# EAGLE board Circuit 7 using 2 555 Bistable units (EAGLE 5.06)
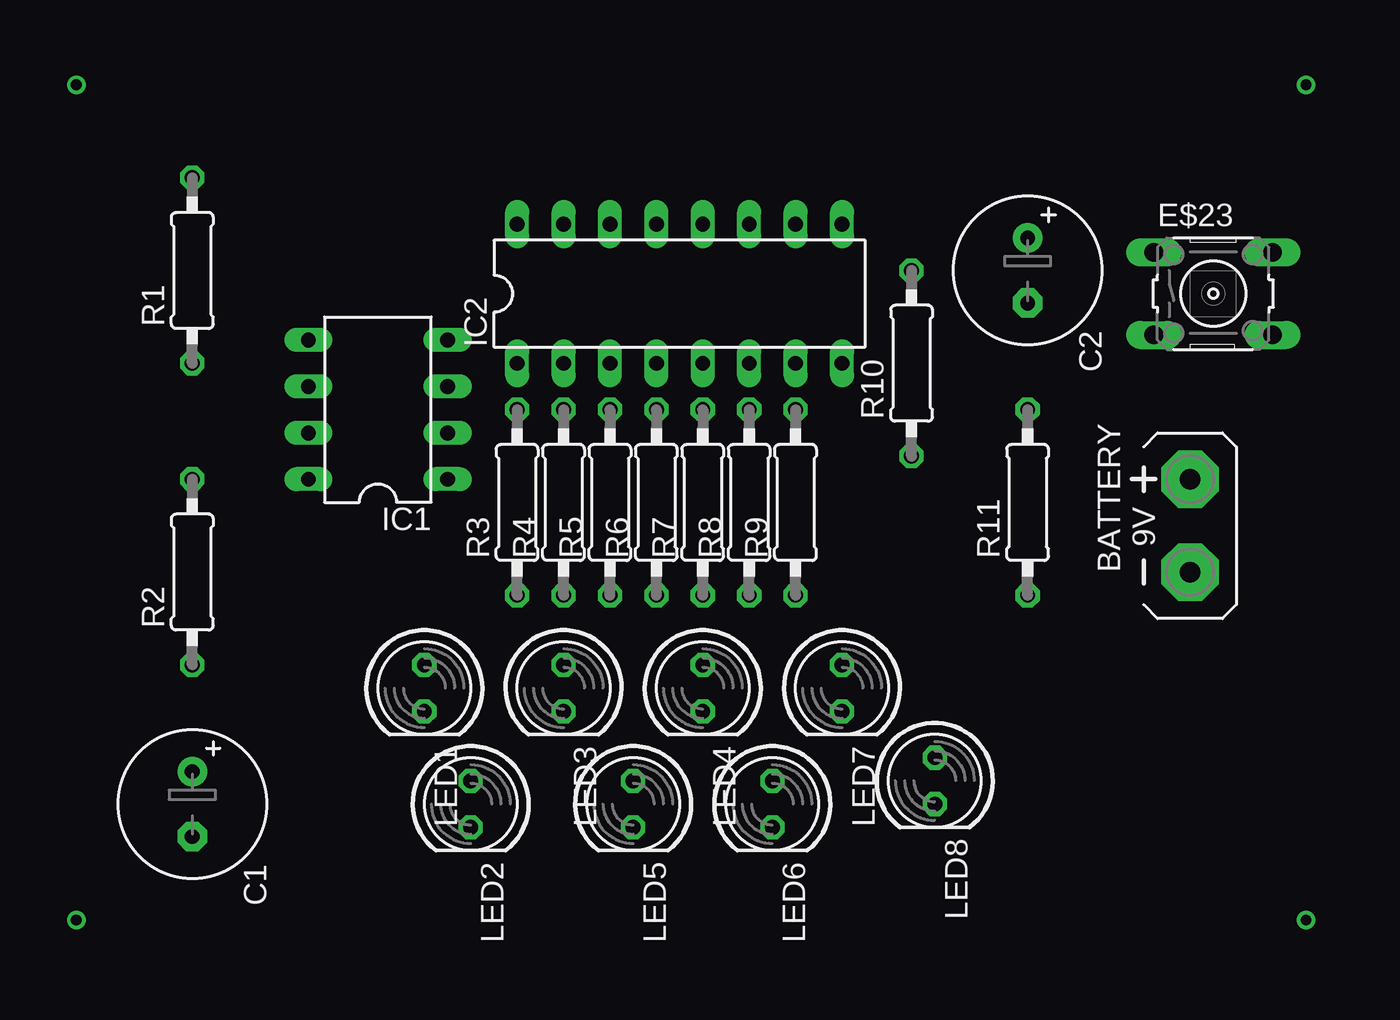
[diagram p0: board, top side]
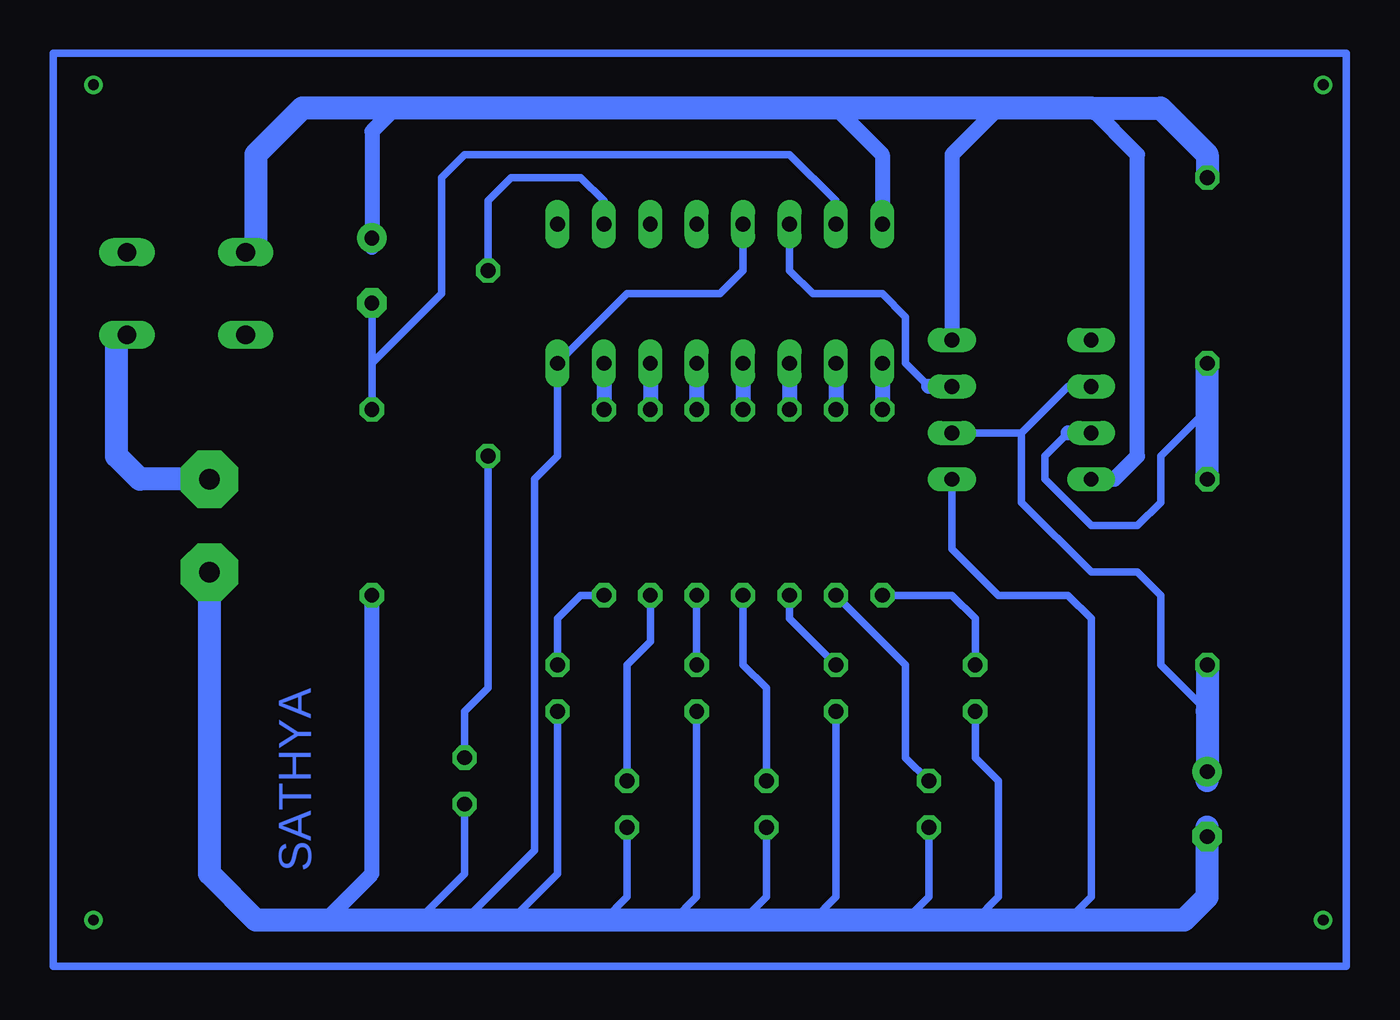
[diagram p1: board, bottom side, seen from below]

No outline drawn. Coordinates in mm, seen from the top.
Copper layers (1*16): Top 0.035mm / dielectric 1.5mm / Bottom 0.035mm
Design rules "default": minimum track width 10mil, minimum drill 24mil, track to track 8mil, track to pad 8mil, pad to pad 8mil, via to via 8mil, smd to smd 8mil, copper to edge 40mil, drill to drill 8mil, minimum pad ring 10mil, minimum via ring 8mil, stop-mask expansion 4mil, vias tented up to drill 0mil, thermal gap 10mil

## Footprints (pad centres in the part's own frame; a part is rotated, then mirrored left to right if it is on the bottom)
AB9V = drill 1.118 pad 3.15 octagon: + 0,2.54; - 0,-2.54
E3,5-8 = drill 0.813 pad 1.6 round: + -1.778,0 | drill 0.813 pad 1.6 octagon: - 1.778,0
B3F-10XX = drill 1.016 long: 1 -3.251,2.261; 2 3.251,2.261; 3 -3.251,-2.261; 4 3.251,-2.261
DIL08 = drill 0.813 long: 1 -3.81,-3.81; 2 -1.27,-3.81; 3 1.27,-3.81; 4 3.81,-3.81; 5 3.81,3.81; 6 1.27,3.81; 7 -1.27,3.81; 8 -3.81,3.81
DIL16 = drill 0.813 long: 1 -8.89,-3.81; 2 -6.35,-3.81; 3 -3.81,-3.81; 4 -1.27,-3.81; 5 1.27,-3.81; 6 3.81,-3.81; 7 6.35,-3.81; 8 8.89,-3.81; 9 8.89,3.81; 10 6.35,3.81; 11 3.81,3.81; 12 1.27,3.81; 13 -1.27,3.81; 14 -3.81,3.81; 15 -6.35,3.81; 16 -8.89,3.81
LED5MM = drill 0.813 octagon: A -1.27,0; K 1.27,0
0207/10 = drill 0.813 octagon: 1 -5.08,0; 2 5.08,0

## Placement (x,y rotation side)
BATTERY  [AB9V]  62.23,24.13 0 top
C1  1uF  [E3,5-8]  7.62,8.89 270 top
C2  1uF  [E3,5-8]  53.34,38.1 270 top
E$23  [B3F-10XX]  63.5,36.83 0 top
IC1  555  [DIL08]  17.78,30.48 90 top
IC2  4017  [DIL16]  34.29,36.83 0 top
LED1  [LED5MM]  20.32,15.24 270 top
LED2  [LED5MM]  22.86,8.89 270 top
LED3  [LED5MM]  27.94,15.24 270 top
LED4  [LED5MM]  35.56,15.24 270 top
LED5  [LED5MM]  31.75,8.89 270 top
LED6  [LED5MM]  39.37,8.89 270 top
LED7  [LED5MM]  43.18,15.24 270 top
LED8  [LED5MM]  48.26,10.16 270 top
R1  2K  [0207/10]  7.62,38.1 90 top
R2  180K  [0207/10]  7.62,21.59 90 top
R3  560  [0207/10]  25.4,25.4 90 top
R4  560  [0207/10]  27.94,25.4 90 top
R5  560  [0207/10]  30.48,25.4 90 top
R6  560  [0207/10]  33.02,25.4 90 top
R7  560  [0207/10]  35.56,25.4 90 top
R8  560  [0207/10]  38.1,25.4 90 top
R9  560  [0207/10]  40.64,25.4 90 top
R10  560  [0207/10]  46.99,33.02 90 top
R11  22K  [0207/10]  53.34,25.4 90 top

## Library data of the parts
BATTERY = battery
C1 C2 R1-R11 = rcl
E$23 = switch-omron
IC1 IC2 = ic-package
LED1-LED8 = led

## Nets
S$2: LED2.A R4.1
S$4: LED3.A R5.1
S$5: LED5.A R6.1
S$6: LED4.A R7.1
S$7: IC1.2 IC1.6 R2.1
S$8: IC1.7 R1.1 R2.2
S$9: IC1.3 IC2.14
S$10: IC2.1 R3.2
S$11: IC2.2 R4.2
S$12: IC2.3 R5.2
S$13: IC2.4 R6.2
S$14: IC2.5 R7.2
S$15: IC2.6 R8.2
S$16: IC2.7 R9.2
S$17: IC2.10 R10.2
S$18: LED1.A R3.1
S$19: LED6.A R8.1
S$20: BATTERY.- IC1.1 IC2.8 IC2.13 LED1.K LED2.K LED3.K LED4.K LED5.K LED6.K LED7.K LED8.K R11.1
S$21: LED7.A R9.1
S$22: LED8.A R10.1
S$23: IC2.15 R11.2
S$24: IC1.4 IC1.8 IC2.16 R1.2
S$29: BATTERY.+

## Tracks (layer width: path | path; a pad name or v marks a point on that pad's centre or on a via)
S$1
  Bottom 0.406: 0,0 70.79,0 70.79,50 0,50 0,0
S$2
  Bottom 0.406: R4.1 24.13,16.51 24.13,11.43 LED2.A
S$3  (via drill 0.6)
  other vias: 1.27,48.26
S$4
  Bottom 0.406: R5.1 30.48,19.05 LED3.A
S$5
  Bottom 0.406: R6.1 33.02,16.51 31.75,15.24 LED5.A
S$6
  Bottom 0.406: R7.1 LED4.A
S$7
  Bottom 0.406: IC1.6 15.24,31.75 17.78,29.21 | 17.78,29.21 IC1.2 | 17.78,29.21 17.78,25.4 13.97,21.59 11.43,21.59 10.16,20.32 10.16,16.51 7.62,13.97
  Bottom 1.27: R2.1 7.62,13.97 7.62,10.16
S$8
  Bottom 0.406: 15.24,29.21 16.51,27.94 16.51,26.67 13.97,24.13 11.43,24.13 10.16,25.4 10.16,27.94 7.62,30.48
  Bottom 0.813: IC1.7 15.24,29.21
  Bottom 1.27: R2.2 7.62,30.48 R1.1
S$9
  Bottom 0.406: 22.86,31.75 24.13,33.02 24.13,35.56 25.4,36.83 29.21,36.83 30.48,38.1 IC2.14
  Bottom 0.813: IC1.3 22.86,31.75
S$10
  Bottom 0.813: IC2.1 R3.2
S$11
  Bottom 0.813: IC2.2 R4.2
S$12
  Bottom 0.813: IC2.3 R5.2
S$13
  Bottom 0.813: IC2.4 R6.2
S$14
  Bottom 0.813: IC2.5 R7.2
S$15
  Bottom 0.813: IC2.6 R8.2
S$16
  Bottom 0.813: IC2.7 R9.2
S$17
  Bottom 0.406: IC2.10 40.64,41.91 41.91,43.18 45.72,43.18 46.99,41.91 R10.2
S$18
  Bottom 0.406: R3.1 21.59,20.32 20.32,19.05 LED1.A
S$19
  Bottom 0.406: R8.1 38.1,17.78 39.37,16.51 LED6.A
S$20
  Bottom 0.406: IC2.13 33.02,38.1 34.29,36.83 39.37,36.83 IC2.8 43.18,27.94 44.45,26.67 44.45,6.35 48.26,2.54 | LED7.K 43.18,5.08 45.72,2.54 | LED6.K 39.37,3.81 40.64,2.54 | LED4.K 35.56,3.81 36.83,2.54 | IC1.1 21.59,22.86 19.05,20.32 15.24,20.32 13.97,19.05 13.97,3.81 15.24,2.54 | LED5.K 31.75,3.81 33.02,2.54 | LED1.K 20.32,11.43 19.05,10.16 19.05,3.81 20.32,2.54 | LED3.K 27.94,3.81 29.21,2.54 | LED2.K 22.86,3.81 24.13,2.54 | LED8.K 48.26,5.08 50.8,2.54
  Bottom 0.813: R11.1 53.34,5.08 55.88,2.54
  Bottom 1.27: BATTERY.- 62.23,5.08 59.69,2.54 55.88,2.54 50.8,2.54 48.26,2.54 45.72,2.54 40.64,2.54 36.83,2.54 33.02,2.54 29.21,2.54 24.13,2.54 20.32,2.54 15.24,2.54 8.89,2.54 7.62,3.81 7.62,7.62
S$21
  Bottom 0.406: R9.1 41.91,20.32 43.18,19.05 LED7.A
S$22
  Bottom 0.406: R10.1 46.99,15.24 48.26,13.97 LED8.A
S$23
  Bottom 0.406: IC2.15 27.94,41.91 30.48,44.45 48.26,44.45 49.53,43.18 49.53,36.83 53.34,33.02 | 53.34,33.02 R11.2 | 53.34,33.02 53.34,36.83
S$24
  Bottom 0.813: 53.34,39.37 53.34,45.72 52.07,46.99 | IC2.16 25.4,44.45 27.94,46.99 | IC1.4 21.59,44.45 19.05,46.99 | 13.97,46.99 11.43,44.45 11.43,27.94 12.7,26.67 IC1.8
  Bottom 1.27: 59.69,39.37 59.69,44.45 57.15,46.99 52.07,46.99 27.94,46.99 19.05,46.99 13.97,46.99 10.16,46.99 7.62,44.45 R1.2
S$26  (via drill 0.6)
  other vias: 1.27,2.54
S$27  (via drill 0.6)
  other vias: 68.58,48.26
S$28  (via drill 0.6)
  other vias: 68.58,2.54
S$29
  Bottom 1.27: 67.31,34.29 67.31,27.94 66.04,26.67 BATTERY.+

## Text on the board
Bottom: SATHYA